# Altium PCB ft232h.PcbDoc (part 2 of 2)
Units mil, origin at the board's own origin, x right, y up, seen from the top; angles counter-clockwise.
Board outline 2559.06 x 1181.1 mil, 4 copper layers (Top Layer, L2, L3, Bottom Layer), stack 62.044 mil thick; 101 components, 60 nets, 328 pads, 69 vias.
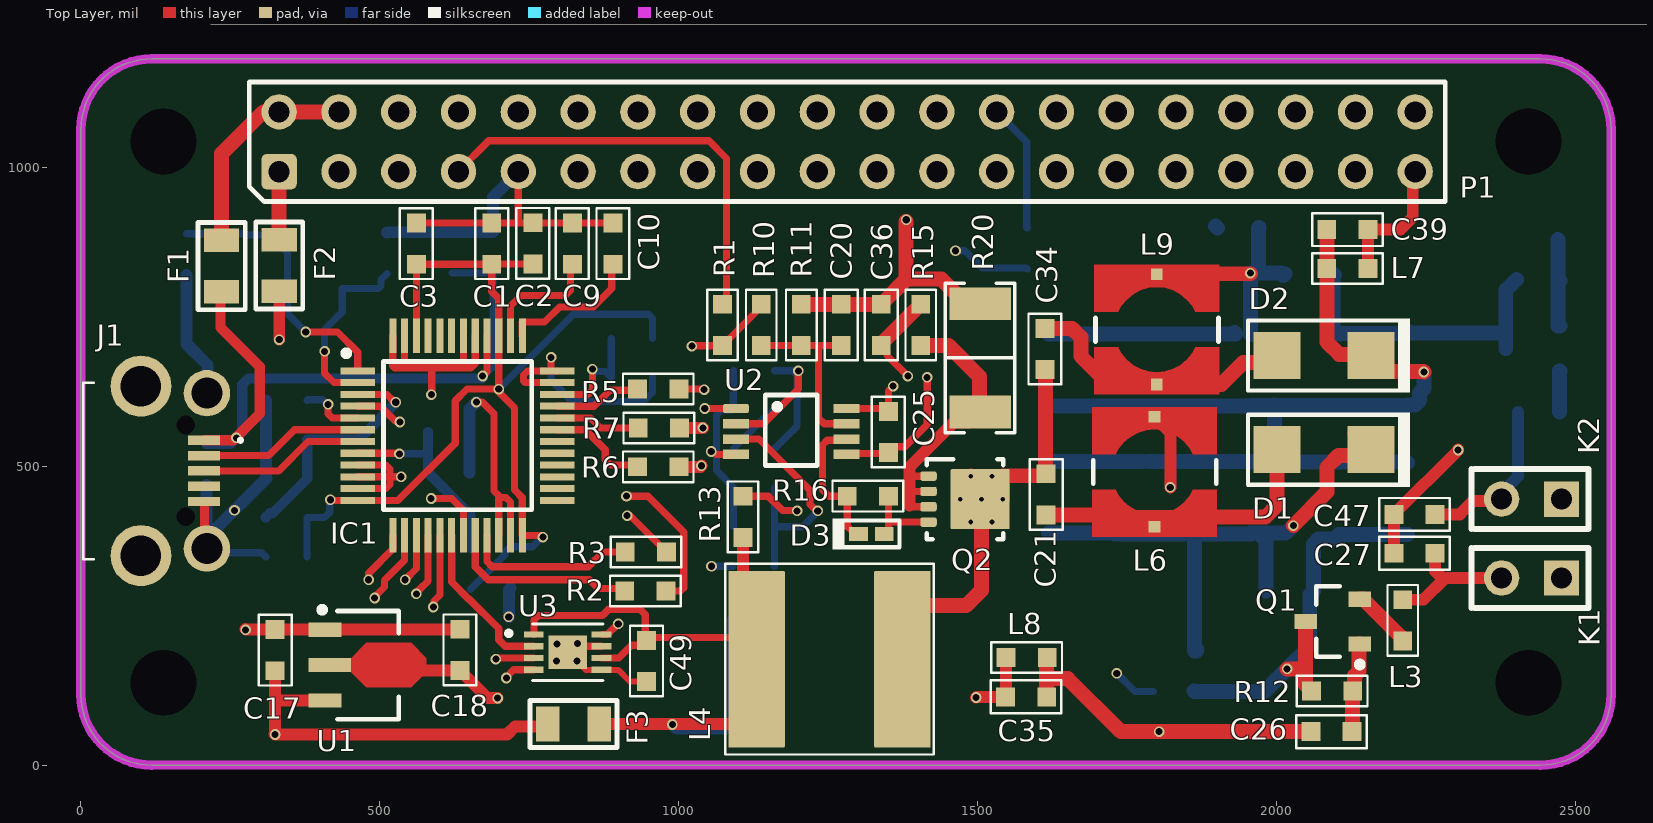
[diagram p0: Top Layer view]

## Silkscreen, mask and mechanical layers (free items; w line width, h text height) (continued)
Top Overlay: (continued)
  text "6,00mil" at 2289.38,4242.15 h60
  text "4,3" at 2929.38,4242.15 h60
  text "4,3" at 2939.22,4242.15 h60
  text "2" at 80.12,4122.15 h60
  text "2" at 89.96,4122.15 h60
  text "L2" at 490.03,4122.15 h60
  text "L2" at 499.87,4122.15 h60
  text "Copper" at 1419.77,4122.15 h60
  text "Copper" at 1429.62,4122.15 h60
  text "1,38mil" at 2279.54,4122.15 h60
  text "1,38mil" at 2289.38,4122.15 h60
  text "Dielectric 1" at 490.03,4002.15 h60
  text "Dielectric 1" at 499.87,4002.15 h60
  text "FR-4" at 1419.77,4002.15 h60
  text "FR-4" at 1429.62,4002.15 h60
  text "44,49mil" at 2279.54,4002.15 h60
  text "44,49mil" at 2289.38,4002.15 h60
  text "4,8" at 2929.38,4002.15 h60
  text "4,8" at 2939.22,4002.15 h60
  text "3" at 80.12,3882.15 h60
  text "3" at 89.96,3882.15 h60
  text "L3" at 490.03,3882.15 h60
  text "L3" at 499.87,3882.15 h60
  text "Copper" at 1419.77,3882.15 h60
  text "Copper" at 1429.62,3882.15 h60
  text "1,38mil" at 2279.54,3882.15 h60
  text "1,38mil" at 2289.38,3882.15 h60
  text "Dielectric 3" at 490.03,3762.15 h60
  text "Dielectric 3" at 499.87,3762.15 h60
  text "PP-018" at 1419.77,3762.15 h60
  text "PP-018" at 1429.62,3762.15 h60
  text "6,00mil" at 2279.54,3762.15 h60
  text "6,00mil" at 2289.38,3762.15 h60
  text "4,3" at 2929.38,3762.15 h60
  text "4,3" at 2939.22,3762.15 h60
  text "4" at 80.12,3642.15 h60
  text "4" at 89.96,3642.15 h60
  text "Bottom Layer" at 490.03,3642.15 h60
  text "Bottom Layer" at 499.87,3642.15 h60
  text "Copper" at 1419.77,3642.15 h60
  text "Copper" at 1429.62,3642.15 h60
  text "1,40mil" at 2279.54,3642.15 h60
  text "1,40mil" at 2289.38,3642.15 h60
  text "Bottom Solder" at 490.03,3522.15 h60
  text "Bottom Solder" at 499.87,3522.15 h60
  text "Solder Resist" at 1419.77,3522.15 h60
  text "Solder Resist" at 1429.62,3522.15 h60
  text "0,40mil" at 2279.54,3522.15 h60
  text "0,40mil" at 2289.38,3522.15 h60
  text "3,5" at 2929.38,3522.15 h60
  text "3,5" at 2939.22,3522.15 h60
  text "Bottom Overlay" at 490.03,3402.15 h60
  text "Bottom Overlay" at 499.87,3402.15 h60
Shape:
  the board outline again, w3.94